# Altium PCB Arduino MEGA blank shield.pcbdoc
Units mm, origin at the board's own origin, x right, y up, seen from the top; angles counter-clockwise.
Board outline 153.67 x 85.72 mm, 2 copper layers (Top Layer, Bottom Layer); 29 components, 86 nets, 176 pads, 4 vias.
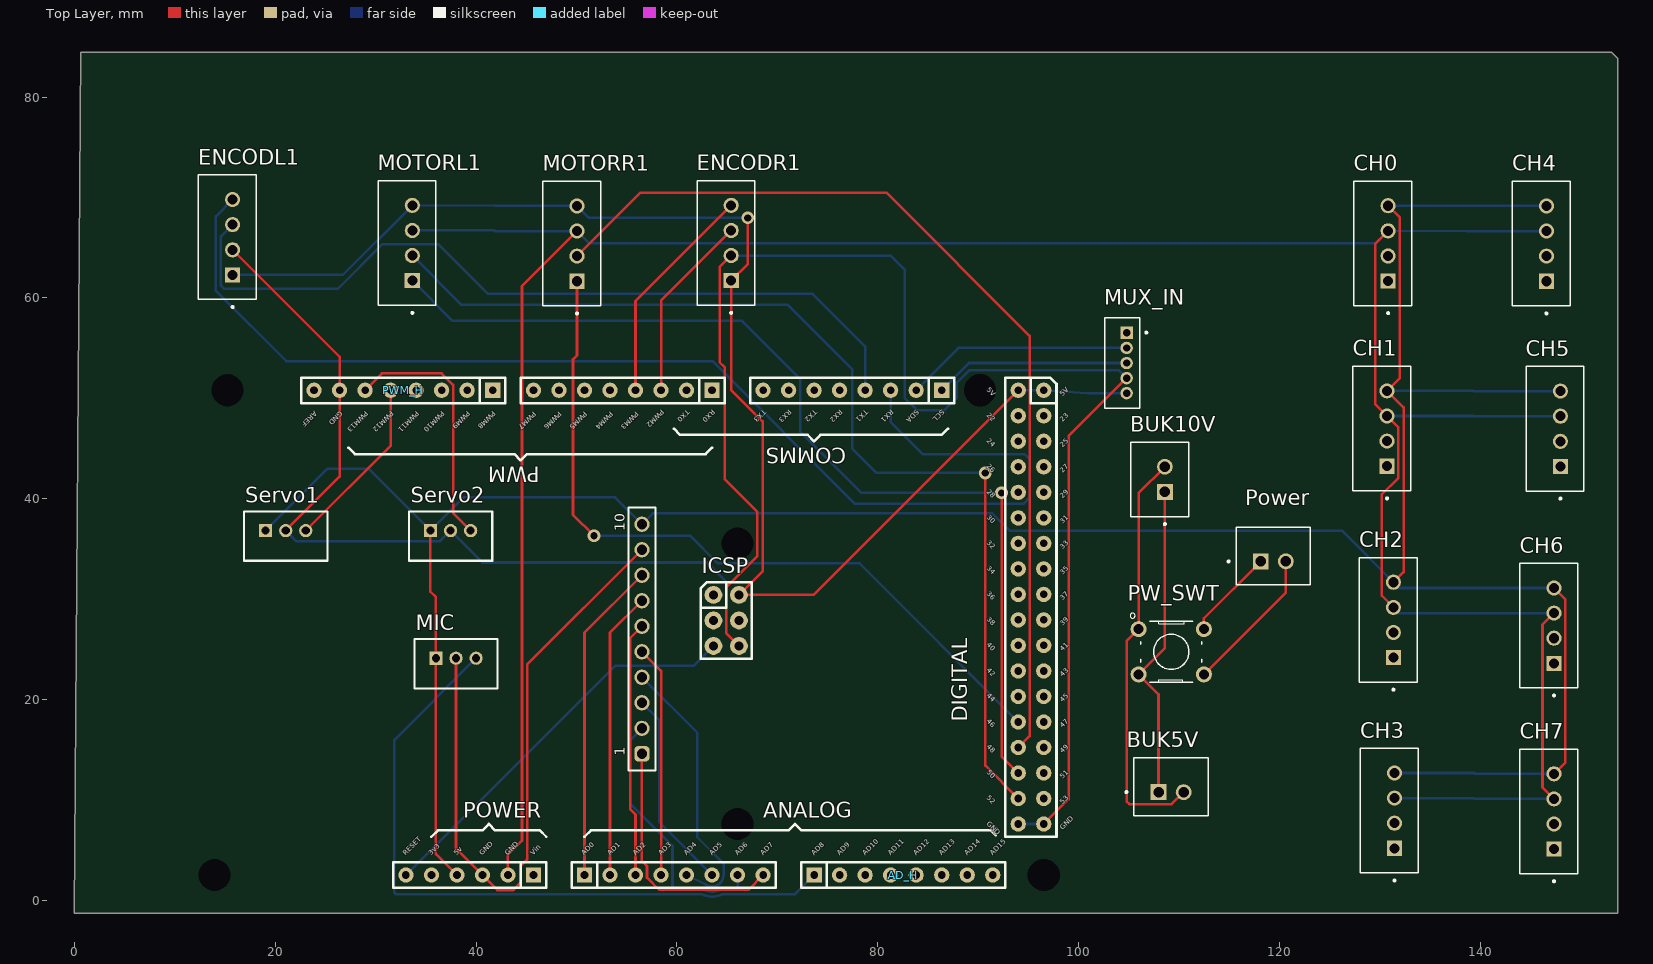
[diagram p0: Top Layer view]
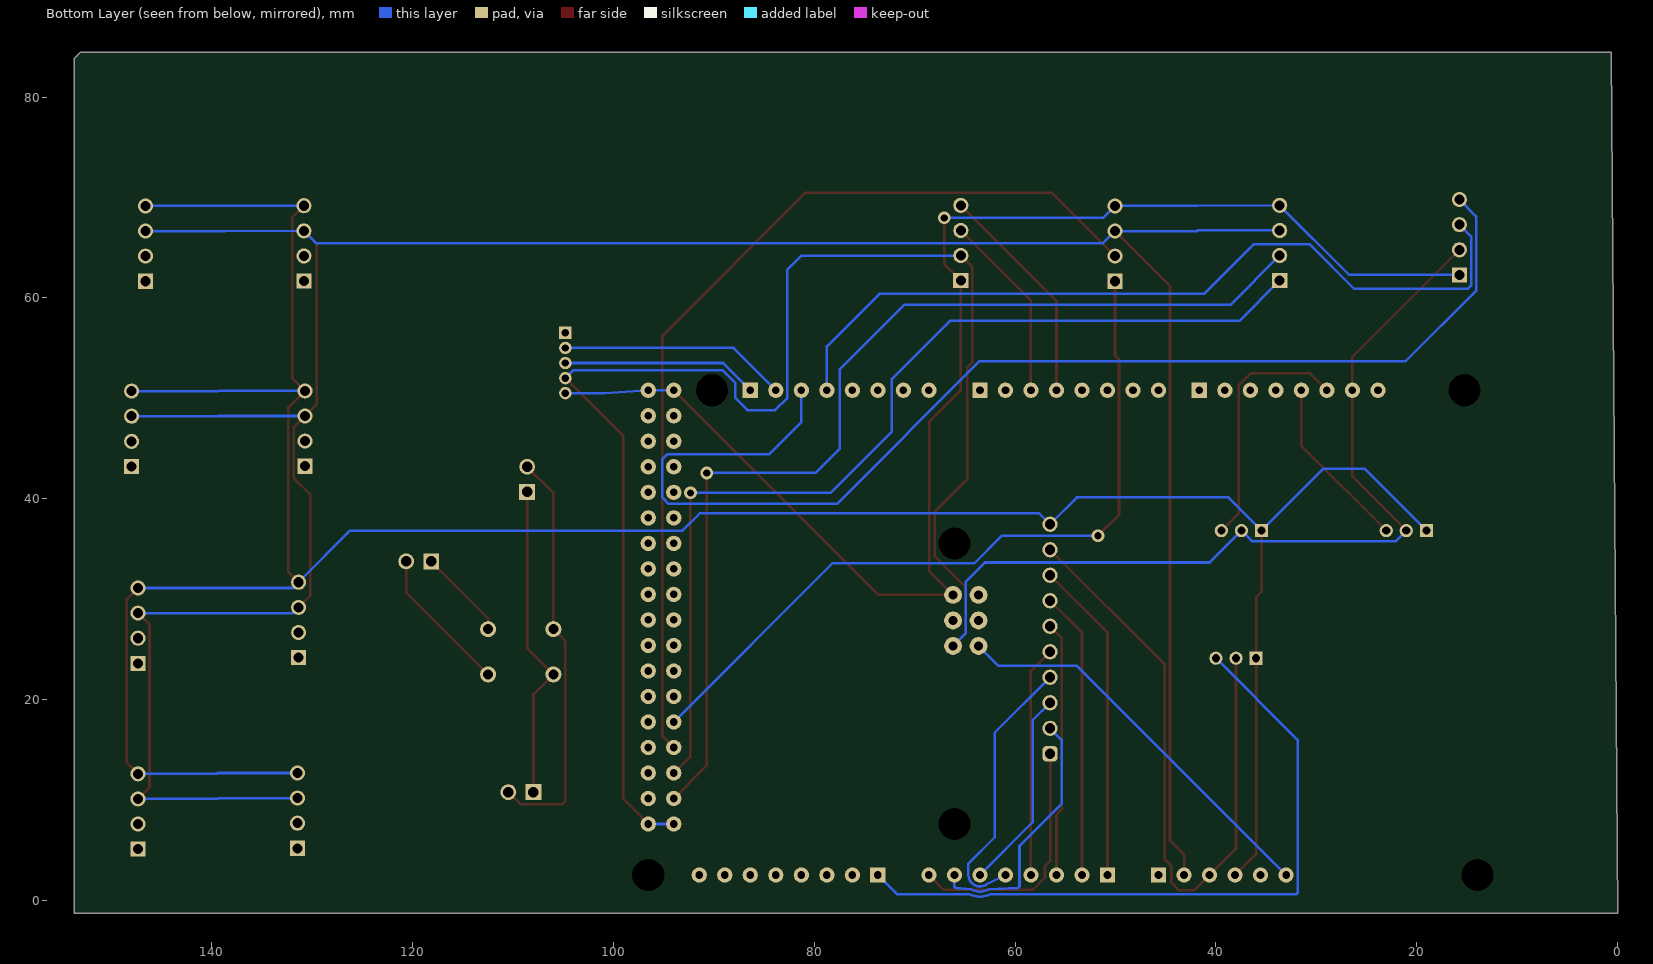
[diagram p1: Bottom Layer view, seen from below]
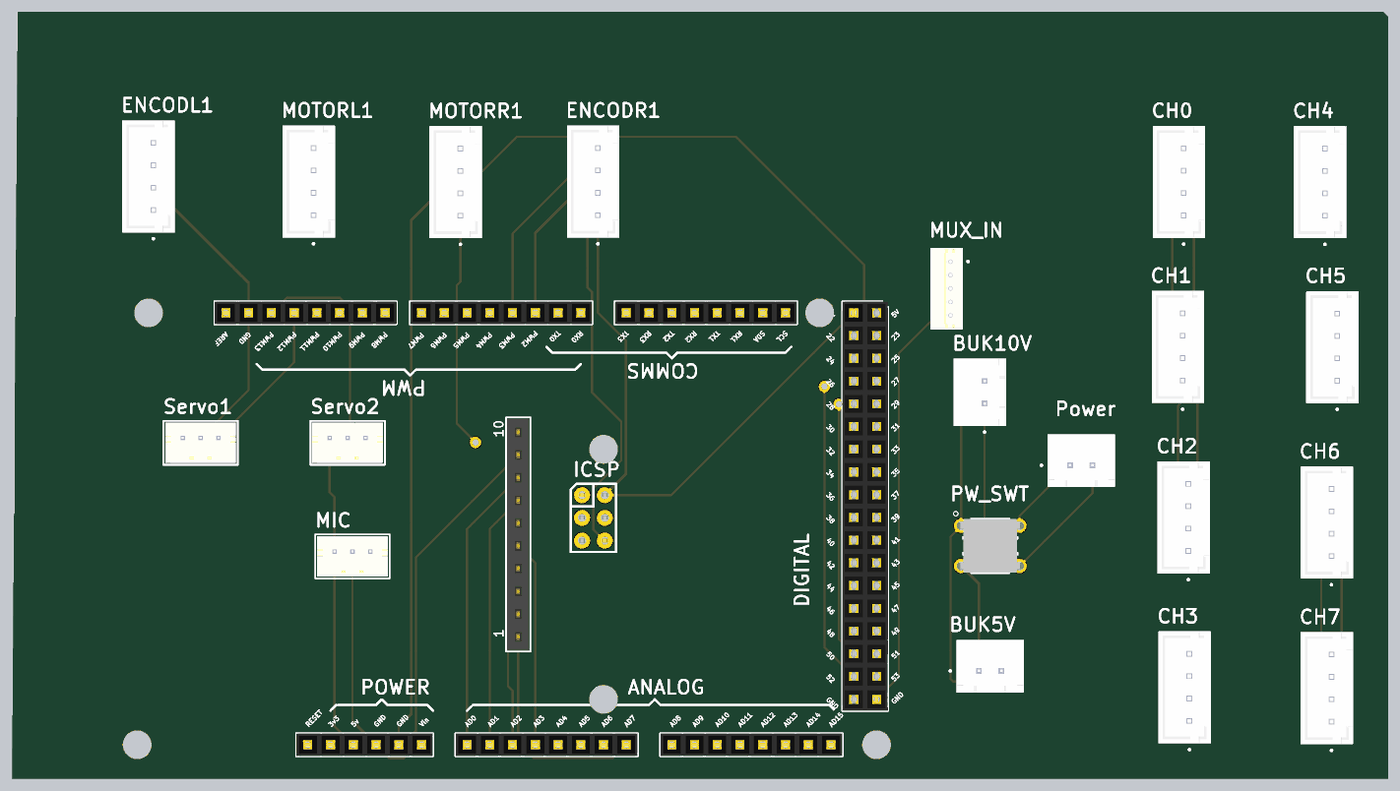
[diagram p2: 3D render of the assembled board from above, using the file's embedded part models]

## Layer stack, top to bottom
Top Solder: solder mask 0.0102, Solder Resist, Dk 3.5
Top Layer: signal copper 0.0356
Dielectric1: dielectric 0.32, FR-4, Dk 4.8
Bottom Layer: signal copper 0.0356
Bottom Solder: solder mask 0.0102, Solder Resist, Dk 3.5

## Board outline
0.635,84.455 153.035,84.455 153.67,83.82 153.67,-1.27 0,-1.27

## Design rules (kind name [scope] priority, off if disabled: settings)
Clearance [All] p1: gap=0.254 ignorepadtopadclearanceinfootprint=FALSE except(0: Arc-Hole Track-Hole SMDPad-Hole THPad-Hole Via-Hole Fill-Hole Poly-Hole Region-Hole Text-Hole)
PolygonConnect [All] p1: connectstyle=Relief reliefconductorwidth=0.254 reliefentries=4 polygonreliefangle="90 Angle" airgapwidth=0.254
RoutingVias [All] p1: holewidth=0.711 width=1.27 viastyle="Through Hole" minholewidth=0.711 minwidth=1.27 maxholewidth=0.711 maxwidth=1.27
SilkToSolderMaskClearance SilkscreenOverComponentPads [IsPad] p1: minsilkscreentomaskgap=0.254 clearancetoexposedcopper=TRUE
SolderMaskExpansion [All] p1: expansion=0.102 istentingtop=FALSE
Width [All] p1: maxlimit=0.254 minlimit=0.254 preferedwidth=0.254
29 further rules are at their usual default settings.

## Components (designator, comment, footprint, x,y, rotation, side; value= is the part's Value field where it differs from the comment)
AD_H "AD_H" "Header 8x1 8.5mm" 73.66,2.54 r0 top locked
ANALOG "AD_L" "Header 8x1 8.5mm" 50.8,2.54 r0 top locked
BUK5V "B2B-XH-A(LF)(SN)" JST_B2B-XH-A(LF)(SN) 109.2,11.32 r0 top
BUK10V "B2B-XH-A(LF)(SN)" JST_B2B-XH-A(LF)(SN) 108.06,41.93 r90 top
CH0 "B4B-XH-A(LF)(SN)" JST_B4B-XH-A(LF)(SN) 130.285,65.425 r90 top
CH1 "B4B-XH-A(LF)(SN)" JST_B4B-XH-A(LF)(SN) 130.175,46.99 r90 top
CH2 "B4B-XH-A(LF)(SN)" JST_B4B-XH-A(LF)(SN) 130.81,27.94 r90 top
CH3 "B4B-XH-A(LF)(SN)" JST_B4B-XH-A(LF)(SN) 130.92,8.95 r90 top
CH4 "B4B-XH-A(LF)(SN)" JST_B4B-XH-A(LF)(SN) 146.05,65.405 r90 top
CH5 "B4B-XH-A(LF)(SN)" JST_B4B-XH-A(LF)(SN) 147.43,46.97 r90 top
CH6 "B4B-XH-A(LF)(SN)" JST_B4B-XH-A(LF)(SN) 146.795,27.365 r90 top
CH7 "B4B-XH-A(LF)(SN)" JST_B4B-XH-A(LF)(SN) 146.795,8.87 r90 top
COMMS "Communication" "Header 8x1 8.5mm" 86.36,50.8 r180 top
DIGITAL "IO_36" "HEADER 36X 8MM" 96.52,50.8 r270 top locked
ENCODL1 "B4B-XH-A(LF)(SN)" JST_B4B-XH-A(LF)(SN) 15.24,66.04 r90 top
ENCODR1 "B4B-XH-A(LF)(SN)" JST_B4B-XH-A(LF)(SN) 64.88,65.465 r90 top
ICSP "ICSP" ICSP 63.64,30.43 r0 top locked
MIC "B3B-PH-K" B3B-PH-K 38.005,24.13 r0 top
MOTORL1 "B4B-XH-A(LF)(SN)" JST_B4B-XH-A(LF)(SN) 33.13,65.465 r90 top
MOTORR1 "B4B-XH-A(LF)(SN)" JST_B4B-XH-A(LF)(SN) 49.53,65.405 r90 top
MUX_IN "B5B-ZR(LF)(SN)" JST_B5B-ZR(LF)(SN) 104.775,56.515 r90 top
Power "B2B-XH-A(LF)(SN)" JST_B2B-XH-A(LF)(SN) 119.38,34.29 r0 top
POWER "POWER" "Header 6x1 8.5mm" 45.72,2.54 r180 top locked
PW_SWT "B3F-1000" SW_B3F-1000 109.22,24.765 r0 top
PWM "PWM_L" "Header 8x1 8.5mm" 63.5,50.8 r180 top locked
PWM_H "PWM_H" "Header 8x1 8.5mm" 41.656,50.8 r180 top locked
Rekya? "61301011821" 61301011821 56.515,26.035 r90 top
Servo1 "B3B-PH-K" B3B-PH-K 21.05,36.83 r0 top
Servo2 "B3B-PH-K" B3B-PH-K 37.465,36.83 r0 top

## Footprints (in the part's own frame and the unit in brackets; to place one, negate y for a bottom-side part, rotate by r counter-clockwise, add the part's x,y. Pads: shape width x height; smd on the part's side, far side on the other; paste and mask are expansions set on the pad)
61301011821 [mm] "Socket Header, Pitch 2.54 mm, THT, Vertical, single row, 10p"
  rrect50% 1.52x1.52 hole 1.02: 1(-11.43,0)
  round 1.52 hole 1.02: 2(-8.89,0) 3(-6.35,0) 4(-3.81,0) 5(-1.27,0) 6(1.27,0) 7(3.81,0) 8(6.35,0) 9(8.89,0) 10(11.43,0)
  silkscreen extent -13.08,-1.35 13.08,1.35, body extent -12.95,-1.25 12.95,1.25, height 8.55
B3B-PH-K [mil]
  rect 52x52 / inner round 52 / far side rect 52x52 hole 32: 1(-78.74,0)
  round 52 hole 32: 2(0,0) 3(78.74,0)
  silkscreen extent -163,-118 163,75, body extent -156,-110 156,67, height 236
"Header 6x1 8.5mm" [mil] "Stackable 6 pin header"
  rect 60x60 hole 30: 1(0,0)
  round 60 hole 30: 2(100,0) 3(200,0) 4(300,0) 5(400,0) 6(500,0)
  silkscreen extent -50,-50 550,50, body extent -50,-50 550,50, height 335
"Header 8x1 8.5mm" [mil] "Stackable 8 pin header"
  rect 60x60 hole 30: 1(0,0)
  round 60 hole 30: 2(100,0) 3(200,0) 4(300,0) 5(400,0) 6(500,0) 7(600,0) 8(700,0)
  silkscreen extent -50,-50 750,50, body extent -50,-50 750,50, height 335
"HEADER 36X 8MM" [mil] "Stackable 10 pin header"
  round 60 hole 30: 1(0,0) 2(0,-100) 3(100,0) 4(100,-100) 5(200,0) 6(200,-100) 7(300,0) 8(300,-100) 9(400,0) 10(400,-100) 11(500,0) 12(500,-100) 13(600,0) 14(600,-100) 15(700,0) 16(700,-100) 17(800,0) 18(800,-100) 19(900,-100) 20(900,0) 21(1000,0) 22(1000,-100) 23(1100,0) 24(1100,-100) 25(1200,0) 26(1200,-100) 27(1300,0) 28(1300,-100) 29(1400,0) 30(1400,-100) 31(1500,0) 32(1500,-100) 33(1600,0) 34(1600,-100) 35(1700,0) 36(1700,-100)
  silkscreen extent -50,-150 1750,50, body extent -50,-150 1750,50, height 335
ICSP [mil]
  round 70 hole 35.43: 1(0,0) 2(100,0) 3(0,-100) 4(100,-100) 5(0,-200) 6(100,-200)
  silkscreen extent -50,-250 150,50, body extent -50,-250 150,50, height 485
JST_B2B-XH-A(LF)(SN) [mm]
  rect 1.575x1.575 / inner round 1.575 / far side rect 1.575x1.575 hole 1.05: 1(-1.25,-0.525)
  round 1.575 hole 1.05: 2(1.25,-0.525)
  silkscreen extent -4.55,-2.88 3.7,2.87, body extent -3.7,-2.88 3.7,2.88, height 7
JST_B4B-XH-A(LF)(SN) [mm]
  rect 1.508x1.508 / inner round 1.508 / far side rect 1.508x1.508 hole 1: 1(-3.75,-0.525)
  round 1.508 hole 1: 2(-1.25,-0.525) 3(1.25,-0.525) 4(3.75,-0.525)
  silkscreen extent -7.05,-2.88 6.2,2.87, body extent -6.2,-2.88 6.2,2.88, height 7
JST_B5B-ZR(LF)(SN) [mm]
  rect 1.238x1.238 / inner round 1.238 / far side rect 1.238x1.238 hole 0.73: 1(0,0)
  round 1.238 hole 0.73: 2(-1.5,0) 3(-3,0) 4(-4.5,0) 5(-6,0)
  silkscreen extent -7.5,-2.06 1.5,2.2, body extent -7.5,-1.3 1.5,2.2, height 4.5
SW_B3F-1000 [mm]
  round 1.6 hole 1: 1(-3.25,2.25) 2(3.25,2.25) 3(-3.25,-2.25) 4(3.25,-2.25)
  silkscreen extent -4.1,-3.05 3.05,3.85, body extent -3.85,-3 3.85,3, height 4.3

## Part data
BUK5V BUK10V Power: "Connector Header Through Hole 2 position 0.098 (2.50mm)", Package=None, Check_prices=https://www.snapeda.com/parts/B2B-XH-A(LF)(SN)/JST+Sales+America+Inc./view-part/?ref=eda, MF="JST Sales", MP=B2B-XH-A(LF)(SN), SnapEDA_Link=https://www.snapeda.com/parts/B2B-XH-A(LF)(SN)/JST+Sales+America+Inc./view-part/?ref=snap
CH0 CH1 CH2 CH3 CH4 CH5 CH6 CH7 ENCODL1 ENCODR1 MOTORL1 MOTORR1: "Connector Header Through Hole 4 position 0.098 (2.50mm)", Package=None, Availability="In Stock", Check_prices=https://www.snapeda.com/parts/B4B-XH-A(LF)(SN)/JST+Sales+America+Inc./view-part/?ref=eda, MF="JST Sales", MP=B4B-XH-A(LF)(SN), Price=None, Purchase-URL=https://pricing.snapeda.com/search/part/B4B-XH-A(LF)(SN)/?ref=eda, SnapEDA_Link=https://www.snapeda.com/parts/B4B-XH-A(LF)(SN)/JST+Sales+America+Inc./view-part/?ref=snap
MIC Servo1 Servo2: "Connector Header Through Hole 3 position 0.079 (2.00mm)", Package=None, Availability="In Stock", Check_prices=https://www.snapeda.com/parts/B3B-PH-K/JST/view-part/?ref=eda, MF=JST, MP=B3B-PH-K, Price=None, Purchase-URL=https://pricing.snapeda.com/search/part/B3B-PH-K/?ref=eda, SnapEDA_Link=https://www.snapeda.com/parts/B3B-PH-K/JST/view-part/?ref=snap
MUX_IN: "Conn Shrouded Header HDR 5 POS 1.5mm Solder ST Thru-Hole Box", Package=None, Availability="In Stock", Check_prices=https://www.snapeda.com/parts/B5B-ZR%20(LF)(SN)/JST/view-part/?ref=eda, MF=JST, MP="B5B-ZR (LF)(SN)", Price=None, Purchase-URL="https://pricing.snapeda.com/search/part/B5B-ZR (LF)(SN)/?ref=eda", SnapEDA_Link=https://www.snapeda.com/parts/B5B-ZR%20(LF)(SN)/JST/view-part/?ref=snap
PW_SWT: "Tactile Switch SPST-NO Top Actuated Through Hole", Package=None, Availability="In Stock", Check_prices=https://www.snapeda.com/parts/B3F-1000/Omron+Electronics+Inc-EMC+Div/view-part/?ref=eda, MF=Omron, MP=B3F-1000, Price=None, Purchase-URL=https://pricing.snapeda.com/search/part/B3F-1000/?ref=eda, SnapEDA_Link=https://www.snapeda.com/parts/B3F-1000/Omron+Electronics+Inc-EMC+Div/view-part/?ref=snap
Rekya?: library part CMP-1502-01332-2, Color=Black, Contact Resistance=20mΩ, Current Rating=3A, Flammability Rating="UL94 V-0", Insulation Resistance=1GΩ, Max Operating Temperature=125°C, Min Operating Temperature=-40°C, Operating Supply Voltage=250V, Connector Type="Header, Socket", Contact Gender=Female, Contact Material=Copper, Contact Plating=Gold, Gender=Female, Height=8.5mm, Housing Material=PBT, Insulation=Insulated, Lead Free="Lead Free", Lead Pitch=2.54mm, Length=25.9mm, Mount="Through Hole", NexarPartId=18818160, Number Of Contacts=10, Number of Pins=10, Number of Positions=10, Number Of Rows=1, Orientation=Vertical, Pitch=2.54mm, REACH SVHC=Unknown, RoHS=Compliant, Termination="Through Hole", Voltage Rating=250V, Width=25.9mm

## Free pads (board coordinates)
  round 1.6 hole 3.2: 0(13.97,2.54) 0(15.24,50.8) 0(66.04,7.62) 0(66.04,35.56) 0(90.17,50.8) 0(96.52,2.54)

## Via types
v1: diameter 1.27, hole 0.711, Top Layer to Bottom Layer, 4 vias

## Nets (pads, with @x,y where several pads share a name; then routed paths per layer and width w, separated by ;. In a path a pad name is that pad's centre, name@x,y a point inside that pad or via, vN(x,y) a via of type N, cw(c..) or ccw(c..) an arc to the next point about the centre after c; other vN are vias at no path point)
3V3: POWER.5
5V: DIGITAL.1 DIGITAL.2 ENCODL1.1 ENCODR1.1 ICSP.2 MOTORL1.4 MOTORR1.4 MUX_IN.5 | length 142.2
  Top Layer w0.254: v1(67.056,67.97) 67.056,63.366 ENCODR1.1 65.405,50.816 68.529,47.692 68.529,32.779 ICSP.2 73.61,30.43 DIGITAL.2
  Bottom Layer w0.254: ENCODL1.1 26.73,62.29 MOTORL1.4 41.894,69.155 MOTORR1.4 51.24,67.97 v1(67.056,67.97) ; DIGITAL.2 DIGITAL.1 100.92,50.515 MUX_IN.5
AD0: ANALOG.1 Rekya?.8 | length 32.2
  Top Layer w0.254: ANALOG.1 50.8,26.67 Rekya?.8
AD1: ANALOG.2 Rekya?.7 | length 28.6
  Top Layer w0.254: ANALOG.2 53.34,26.67 Rekya?.7
AD2: ANALOG.3 Rekya?.6 | length 25.4
  Top Layer w0.254: ANALOG.3 55.88,8.56 55.372,9.068 55.372,26.162 Rekya?.6
AD3: ANALOG.4 Rekya?.5 | length 23
  Top Layer w0.254: Rekya?.5 58.42,22.86 ANALOG.4
AD4: ANALOG.5 Rekya?.4 | length 27.7
  Bottom Layer w0.254: Rekya?.4 62.027,16.713 62.027,6.299 64.569,3.757 64.643,3.683 64.643,2.54 cw(c63.5,2.54) 62.782,1.651 ANALOG.5
AD5: ANALOG.6 Rekya?.3 | length 20
  Bottom Layer w0.254: Rekya?.3 58.242,17.958 58.242,7.798 ANALOG.6
AD6: ANALOG.7 Rekya?.2 | length 25.8
  Bottom Layer w0.254: Rekya?.2 55.372,16.002 55.372,9.627 59.563,5.436 59.563,1.397 59.712,1.248 62.62,1.143 ccw(c63.5,2.54) 64.38,1.143 65.891,1.248 66.04,1.397 ANALOG.7
AD8: AD_H.1 MIC.3 | length 69.4
  Bottom Layer w0.254: MIC.3 31.877,16.002 31.877,0.784 31.951,0.709 32.026,0.635 62.484,0.635 ccw(c63.5,2.54) 64.516,0.635 71.755,0.635 AD_H.1
AD9: AD_H.2
AD10: AD_H.3
AD11: AD_H.4
AD12: AD_H.5
AD13: AD_H.6
AD14: AD_H.7
AD15: AD_H.8
AREF: PWM_H.8
GND: DIGITAL.35 DIGITAL.36 ENCODL1.2 ENCODR1.2 ICSP.6 MUX_IN.4 PWM_H.7 Servo1.2 Servo2.2 | length 237.5
  Top Layer w0.254: ENCODL1.2 26.416,54.139 PWM_H.7 26.416,42.196 Servo1.2 ; ENCODR1.2 64.262,63.072 64.262,53.594 64.745,53.111 64.745,41.961 68.021,38.684 68.021,34.29 64.91,31.179 64.91,26.62 ICSP.6 ; DIGITAL.35 99.009,10.109 99.009,46.249 MUX_IN.4
  Bottom Layer w0.254: Servo1.2 22.091,35.789 36.424,35.789 Servo2.2 40.64,33.655 63.005,33.655 64.91,31.75 64.91,26.62 ICSP.6 ; ENCODR1.2 81.28,64.215 82.677,62.818 82.677,50.038 83.896,48.819 86.639,48.819 87.859,50.038 87.859,51.537 89.103,52.781 104.009,52.781 MUX_IN.4 ; DIGITAL.36 DIGITAL.35
IO22: DIGITAL.3
IO23: DIGITAL.4
IO24: DIGITAL.5
IO25: DIGITAL.6
IO26: DIGITAL.7
IO27: DIGITAL.8
IO28: DIGITAL.9
IO29: DIGITAL.10
IO30: DIGITAL.11
IO31: DIGITAL.12
IO32: DIGITAL.13
IO33: DIGITAL.14
IO34: DIGITAL.15
IO35: DIGITAL.16
IO36: DIGITAL.17
IO37: DIGITAL.18
IO38: DIGITAL.19
IO39: DIGITAL.20
IO40: DIGITAL.21
IO41: DIGITAL.22
IO42: DIGITAL.23
IO43: DIGITAL.24
IO44: DIGITAL.25
IO45: DIGITAL.26
IO46: DIGITAL.27
IO47: DIGITAL.28 MOTORR1.1 | length 76.3
  Top Layer w0.254: MOTORR1.1 50.055,54.271 49.657,53.873 49.657,38.405 v1(51.74,36.322)
  Bottom Layer w0.254: v1(51.74,36.322) 61.316,36.322 64.059,33.579 78.181,33.579 DIGITAL.28
IO48: DIGITAL.29
IO49: DIGITAL.30 MOTORR1.2 | length 95
  Top Layer w0.254: MOTORR1.2 56.385,70.485 80.848,70.485 95.123,56.21 95.123,16.383 DIGITAL.30
IO50: DIGITAL.31
IO51: DIGITAL.32 MOTORL1.1 | length 99.1
  Top Layer w0.254: v1(92.329,40.589) 92.329,14.351 DIGITAL.32
  Bottom Layer w0.254: MOTORL1.1 37.661,57.709 66.497,57.709 72.263,51.943 72.263,46.711 78.384,40.589 v1(92.329,40.589)
IO52: DIGITAL.33
IO53: DIGITAL.34 MOTORL1.2 | length 104.4
  Top Layer w0.254: v1(90.703,42.57) 90.703,13.437 DIGITAL.34
  Bottom Layer w0.254: MOTORL1.2 38.561,59.309 71.044,59.309 77.47,52.883 77.47,44.958 79.858,42.57 v1(90.703,42.57)
MISO: ICSP.1
MOSI: ICSP.4
NetANALOG_8: ANALOG.8 Rekya?.1 | length 25.2
  Top Layer w0.254: Rekya?.1 56.515,3.937 57.023,3.429 57.023,2.286 58.242,1.067 67.107,1.067 ANALOG.8
NetBUK5V_1: BUK5V.1 BUK10V.1 PW_SWT.3 | length 31.8
  Top Layer w0.254: BUK5V.1 107.95,20.535 PW_SWT.3 108.585,25.13 BUK10V.1
NetBUK5V_2: BUK5V.2 BUK10V.2 PW_SWT.1 | length 41.2
  Top Layer w0.254: BUK10V.2 105.97,40.565 PW_SWT.1 104.775,25.82 104.775,9.881 105.054,9.601 109.256,9.601 BUK5V.2
NetCH0_3: CH0.3 CH1.3 CH2.3 CH3.3 CH4.3 CH5.3 CH6.3 CH7.3 MOTORL1.3 MOTORR1.3 POWER.2 | length 289.9
  Top Layer w0.254: POWER.2 43.18,4.573 44.577,5.97 44.577,61.177 MOTORR1.3 ; CH0.3 129.54,65.405 129.54,49.4 CH1.3 131.835,47.105 131.835,42.088 130.175,40.428 130.175,30.35 CH2.3 ; CH7.3 146.177,11.263 146.177,27.472 CH6.3
  Bottom Layer w0.254: MOTORL1.3 41.808,66.715 41.868,66.655 MOTORR1.3 51.254,65.456 129.591,65.456 CH0.3 138.704,66.655 CH4.3 ; CH1.3 139.294,48.24 139.314,48.22 CH5.3 ; CH2.3 131.91,28.615 CH6.3 ; CH3.3 139.319,10.2 139.399,10.12 CH7.3
NetCH0_4: CH0.4 CH1.4 CH2.4 CH3.4 CH4.4 CH5.4 CH6.4 CH7.4 MIC.1 POWER.4 Rekya?.10 Servo1.1 Servo2.1 | length 282.7
  Top Layer w0.254: Servo2.1 35.465,30.741 36.005,30.201 MIC.1 36.005,4.635 POWER.4 ; CH0.4 131.953,68.032 131.953,51.993 CH1.4 132.343,49.097 132.343,32.698 CH2.4 ; CH7.4 148.463,13.763 148.463,29.972 CH6.4
  Bottom Layer w0.254: Servo1.1 25.222,43.002 29.293,43.002 Servo2.1 38.767,40.132 53.848,40.132 Rekya?.10 57.607,38.557 91.389,38.557 93.116,36.83 126.195,36.83 CH2.4 131.91,31.115 CH6.4 ; CH1.4 139.294,50.74 139.314,50.72 CH5.4 ; CH0.4 138.659,69.175 138.679,69.155 CH4.4 ; CH3.4 139.37,12.7 139.45,12.62 CH7.4
NetMIC_2: MIC.2 POWER.3 Rekya?.9 | length 65.6
  Top Layer w0.254: MIC.2 38.005,5.175 POWER.3 42.139,1.041 43.713,1.041 44.45,1.778 44.45,3.429 45.085,4.064 45.085,23.495 Rekya?.9
NetPower_1: Power.1 PW_SWT.2 | length 9.1
  Top Layer w0.254: PW_SWT.2 112.47,28.105 Power.1
NetPower_2: Power.2 PW_SWT.4 | length 14.6
  Top Layer w0.254: PW_SWT.4 120.63,30.675 Power.2
PWM2: ENCODR1.3 PWM.3 | length 18.8
  Top Layer w0.254: PWM.3 58.42,59.73 ENCODR1.3
PWM3: ENCODR1.4 PWM.4 | length 22.4
  Top Layer w0.254: PWM.4 55.88,59.69 ENCODR1.4
PWM4: PWM.5
PWM5: PWM.6
PWM6: PWM.7
PWM7: PWM.8
PWM8: PWM_H.1
PWM9: PWM_H.2
PWM10: PWM_H.3
PWM11: PWM_H.4
PWM12: PWM_H.5 Servo1.3 | length 17.5
  Top Layer w0.254: Servo1.3 31.496,45.276 PWM_H.5
PWM13: PWM_H.6 Servo2.3 | length 25.2
  Top Layer w0.254: PWM_H.6 30.632,52.476 36.576,52.476 37.719,51.333 37.719,38.576 Servo2.3
RESET: ICSP.5 POWER.6 | length 40.1
  Bottom Layer w0.254: POWER.6 53.873,23.393 61.683,23.393 ICSP.5
RX0: PWM.1
RX1: COMMS.3 ENCODL1.4 | length 122.2
  Bottom Layer w0.254: ENCODL1.4 14.097,68.122 14.097,60.706 21.107,53.696 63.551,53.696 77.749,39.497 94.488,39.497 95.123,40.132 95.123,43.942 94.615,44.45 84.455,44.45 81.28,47.625 COMMS.3
RX2: COMMS.5
RX3: COMMS.7
SCK: ICSP.3
SCL: COMMS.1 MUX_IN.3 | length 19.5
  Bottom Layer w0.254: COMMS.1 89.075,53.515 MUX_IN.3
SDA: COMMS.2 MUX_IN.2 | length 22.7
  Bottom Layer w0.254: COMMS.2 88.035,55.015 MUX_IN.2
TX0: PWM.2
TX1: COMMS.4 ENCODL1.3 | length 81.2
  Bottom Layer w0.254: ENCODL1.3 14.605,66.13 14.605,61.214 14.91,60.909 26.238,60.909 30.683,65.354 36.22,65.354 41.173,60.401 73.508,60.401 78.74,55.169 COMMS.4
TX2: COMMS.6
TX3: COMMS.8
VIN: POWER.1
pads on no net: CH0.1 CH0.2 CH1.1 CH1.2 CH2.1 CH2.2 CH3.1 CH3.2 CH4.1 CH4.2 CH5.1 CH5.2 CH6.1 CH6.2 CH7.1 CH7.2 MUX_IN.1

## Silkscreen, mask and mechanical layers (free items; w line width, h text height)
Top Overlay:
  lines w0.254: 27.305,45.085 27.94,44.45 43.815,44.45 44.45,43.815 45.085,44.45 62.865,44.45 63.5,45.085 ; 35.56,6.35 36.195,6.985 40.64,6.985 41.275,7.62 41.91,6.985 46.355,6.985 46.99,6.35 ; 50.8,6.35 51.435,6.985 71.12,6.985 71.755,7.62 72.39,6.985 91.26,6.985 91.763,6.483 ; 59.69,46.99 60.325,46.355 73.025,46.355 73.66,45.72 74.295,46.355 86.36,46.355 86.995,46.99
  text "5V" at 90.805,50.8 h0.51 r315
  text "5V" at 98.425,50.165 h0.51 r45
  text "PWM2" at 58.42,48.895 h0.51 r225
  text "TX0" at 60.96,48.895 h0.51 r225
  text "RX0" at 63.5,48.895 h0.51 r225
  text "TX3" at 68.58,48.895 h0.51 r225
  text "RX3" at 71.12,48.895 h0.51 r225
  text "TX2" at 73.66,48.895 h0.51 r225
  text "RX2" at 76.2,48.895 h0.51 r225
  text "TX1" at 78.74,48.895 h0.51 r225
  text "RX1" at 81.28,48.895 h0.51 r225
  text "SDA" at 83.82,48.895 h0.51 r225
  text "SCL" at 86.36,48.895 h0.51 r225
  text "AREF" at 23.876,48.768 h0.51 r225
  text "GND" at 26.416,48.768 h0.51 r225
  text "PWM13" at 28.956,48.768 h0.51 r225
  text "PWM12" at 31.496,48.768 h0.51 r225
  text "PWM11" at 34.036,48.768 h0.51 r225
  text "PWM10" at 36.576,48.768 h0.51 r225
  text "PWM9" at 39.116,48.768 h0.51 r225
  text "PWM8" at 41.656,48.768 h0.51 r225
  text "PWM7" at 45.72,48.715 h0.51 r225
  text "PWM6" at 48.26,48.715 h0.51 r225
  text "PWM5" at 50.8,48.715 h0.51 r225
  text "PWM4" at 53.34,48.715 h0.51 r225
  text "PWM3" at 55.88,48.715 h0.51 r225
  text "22" at 90.805,48.26 h0.51 r315
  text "23" at 98.425,47.625 h0.51 r45
  text "24" at 90.805,45.72 h0.51 r315
  text "25" at 98.425,45.085 h0.51 r45
  text "26" at 90.805,43.18 h0.51 r315
  text "27" at 98.425,42.545 h0.51 r45
  text "28" at 90.805,40.64 h0.51 r315
  text "29" at 98.425,40.005 h0.51 r45
  text "30" at 90.805,38.1 h0.51 r315
  text "31" at 98.425,37.465 h0.51 r45
  text "32" at 90.805,35.56 h0.51 r315
  text "33" at 98.425,34.925 h0.51 r45
  text "34" at 90.805,33.02 h0.51 r315
  text "35" at 98.425,32.385 h0.51 r45
  text "36" at 90.805,30.48 h0.51 r315
  text "37" at 98.425,29.845 h0.51 r45
  text "38" at 90.805,27.94 h0.51 r315
  text "39" at 98.425,27.305 h0.51 r45
  text "40" at 90.805,25.4 h0.51 r315
  text "41" at 98.425,24.765 h0.51 r45
  text "42" at 90.805,22.86 h0.51 r315
  text "43" at 98.425,22.225 h0.51 r45
  text "44" at 90.805,20.32 h0.51 r315
  text "45" at 98.425,19.685 h0.51 r45
  text "46" at 90.805,17.78 h0.51 r315
  text "47" at 98.425,17.145 h0.51 r45
  text "48" at 90.805,15.24 h0.51 r315
  text "49" at 98.425,14.605 h0.51 r45
  text "50" at 90.805,12.7 h0.51 r315
  text "51" at 98.425,12.065 h0.51 r45
  text "52" at 90.805,10.16 h0.51 r315
  text "53" at 98.425,9.525 h0.51 r45
  text "GND" at 90.805,7.62 h0.51 r315
  text "GND" at 98.425,6.985 h0.51 r45
  text "RESET" at 33.02,4.445 h0.51 r45
  text "3v3" at 35.56,4.445 h0.51 r45
  text "5v" at 38.1,4.445 h0.51 r45
  text "GND" at 40.64,4.445 h0.51 r45
  text "GND" at 43.18,4.445 h0.51 r45
  text "Vin" at 45.72,4.445 h0.51 r45
  text "AD0" at 50.8,4.445 h0.51 r45
  text "AD1" at 53.34,4.445 h0.51 r45
  text "AD2" at 55.88,4.445 h0.51 r45
  text "AD3" at 58.42,4.445 h0.51 r45
  text "AD4" at 60.96,4.445 h0.51 r45
  text "AD5" at 63.5,4.445 h0.51 r45
  text "AD6" at 66.04,4.445 h0.51 r45
  text "AD7" at 68.58,4.445 h0.51 r45
  text "AD8" at 73.66,4.445 h0.51 r45
  text "AD9" at 76.2,4.445 h0.51 r45
  text "AD10" at 78.74,4.445 h0.51 r45
  text "AD11" at 81.28,4.445 h0.51 r45
  text "AD12" at 83.82,4.445 h0.51 r45
  text "AD13" at 86.36,4.445 h0.51 r45
  text "AD14" at 88.9,4.445 h0.51 r45
  text "AD15" at 91.44,4.445 h0.51 r45
Mechanical 1:
  circle w0.127: c96.52,2.54 r1.6
  circle w0.127: c90.17,50.8 r1.6
  circle w0.127: c66.04,35.56 r1.6
  circle w0.127: c13.97,2.54 r1.6
  circle w0.127: c66.04,7.62 r1.6
  circle w0.127: c15.24,50.8 r1.6
  lines w0.127: 0,0 0,53.34 96.52,53.34 99.06,50.8 99.06,40.64 101.6,38.1 101.6,3.81 99.06,1.27 99.06,0 0,0

## Text inside footprints (layer, text, board x,y; h text height)
MIC: Top 3D Body ">LABEL" at 34.068,19.685 h1.02
Rekya?: Top Overlay "1" at 54.815,14.415 h1.02 r90; Top Overlay "10" at 54.815,36.785 h1.02 r90
Servo1: Top 3D Body ">LABEL" at 17.113,32.385 h1.02
Servo2: Top 3D Body ">LABEL" at 33.528,32.385 h1.02